# Altium PCB CAN_PCB.PcbDoc
Units mm, origin at the board's own origin, x right, y up, seen from the top; angles counter-clockwise.
Board outline 48.27 x 28.2 mm, 2 copper layers (Top Layer, Bottom Layer); 17 components, 16 nets, 67 pads, 16 vias.
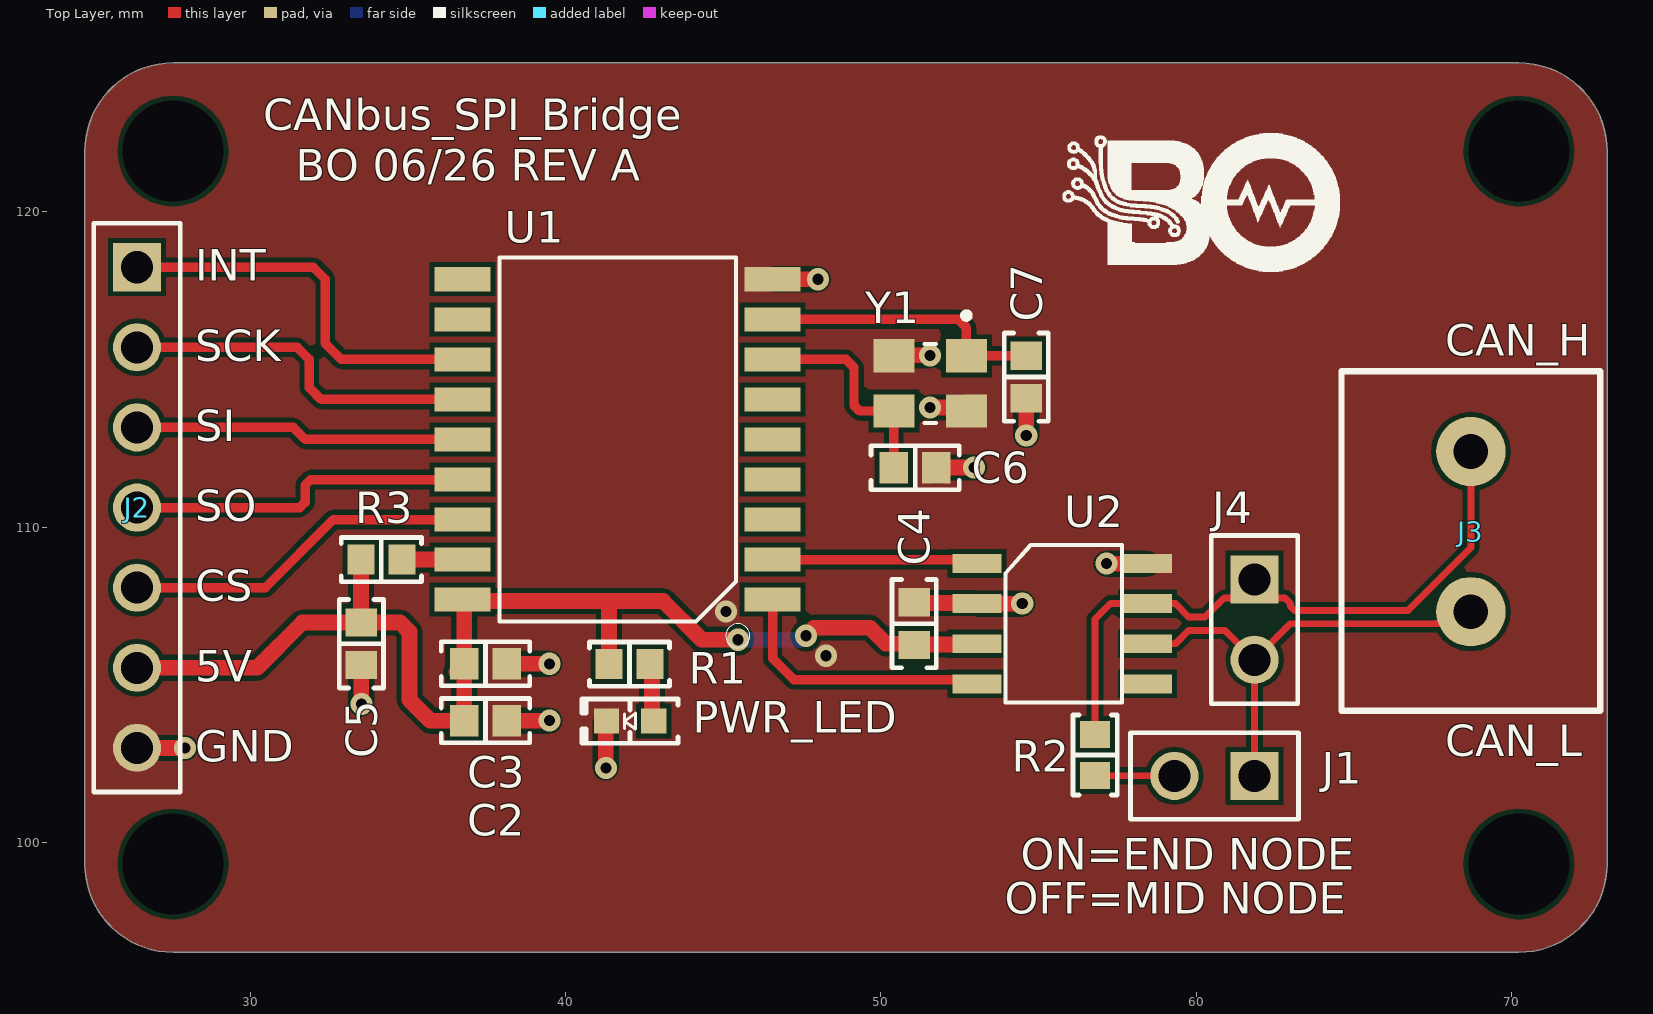
[diagram p0: Top Layer view]
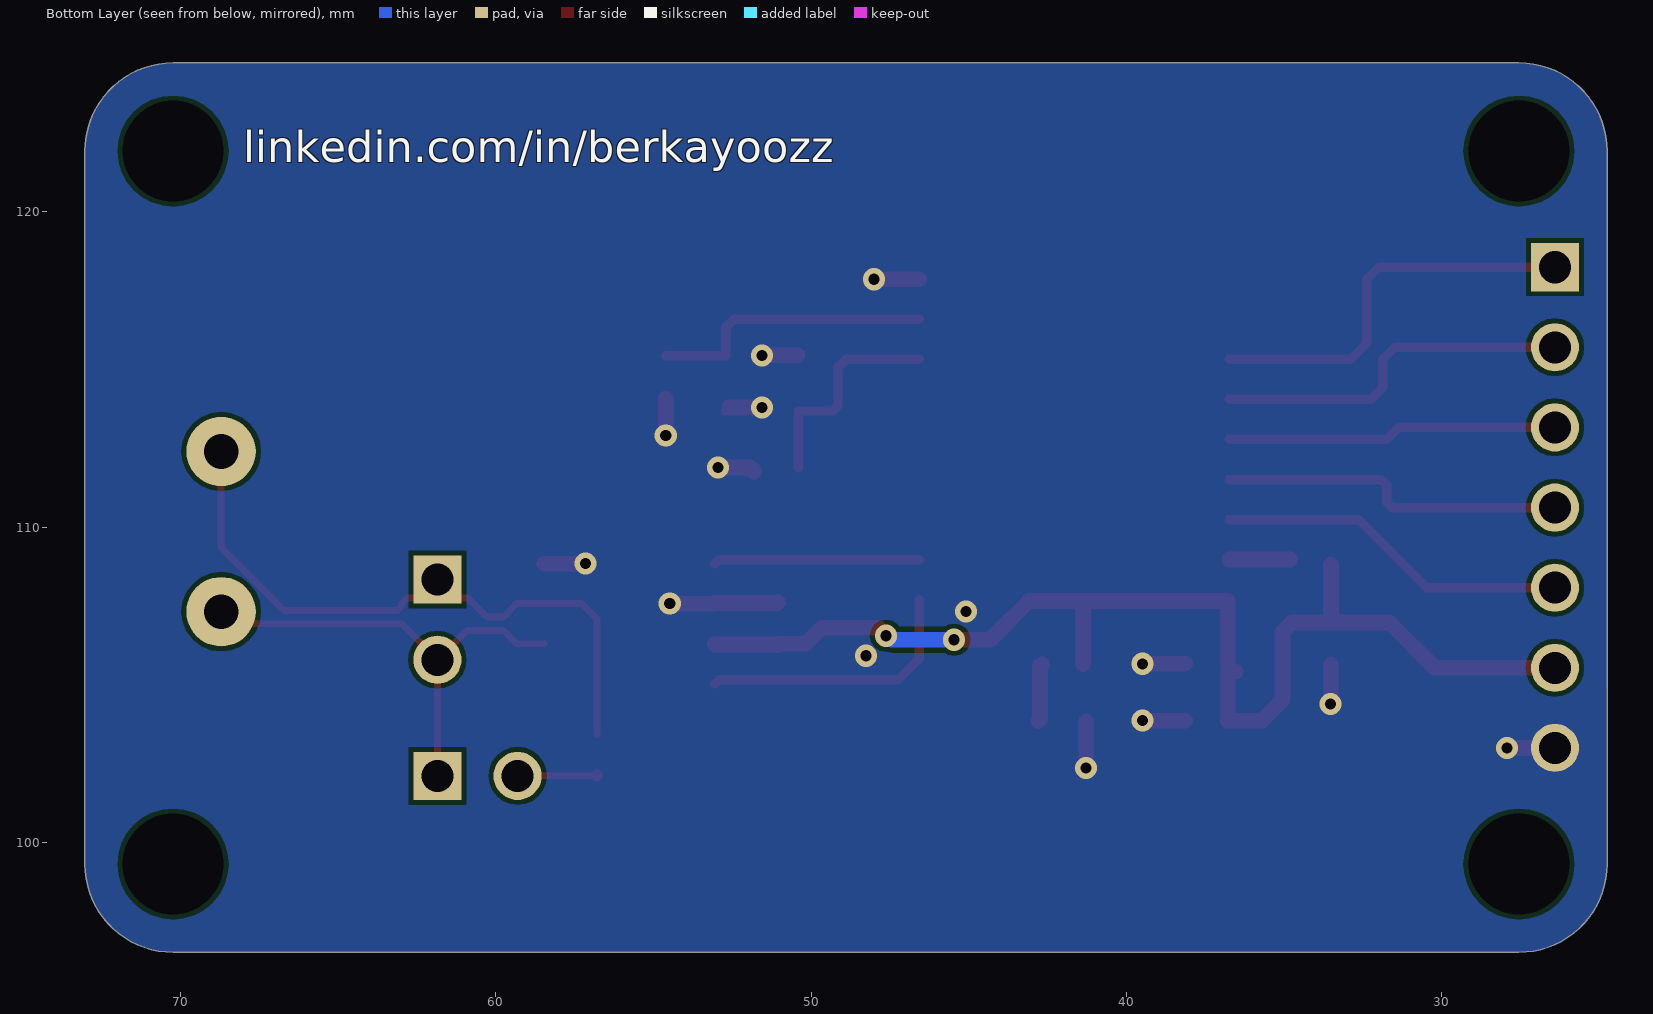
[diagram p1: Bottom Layer view, seen from below]
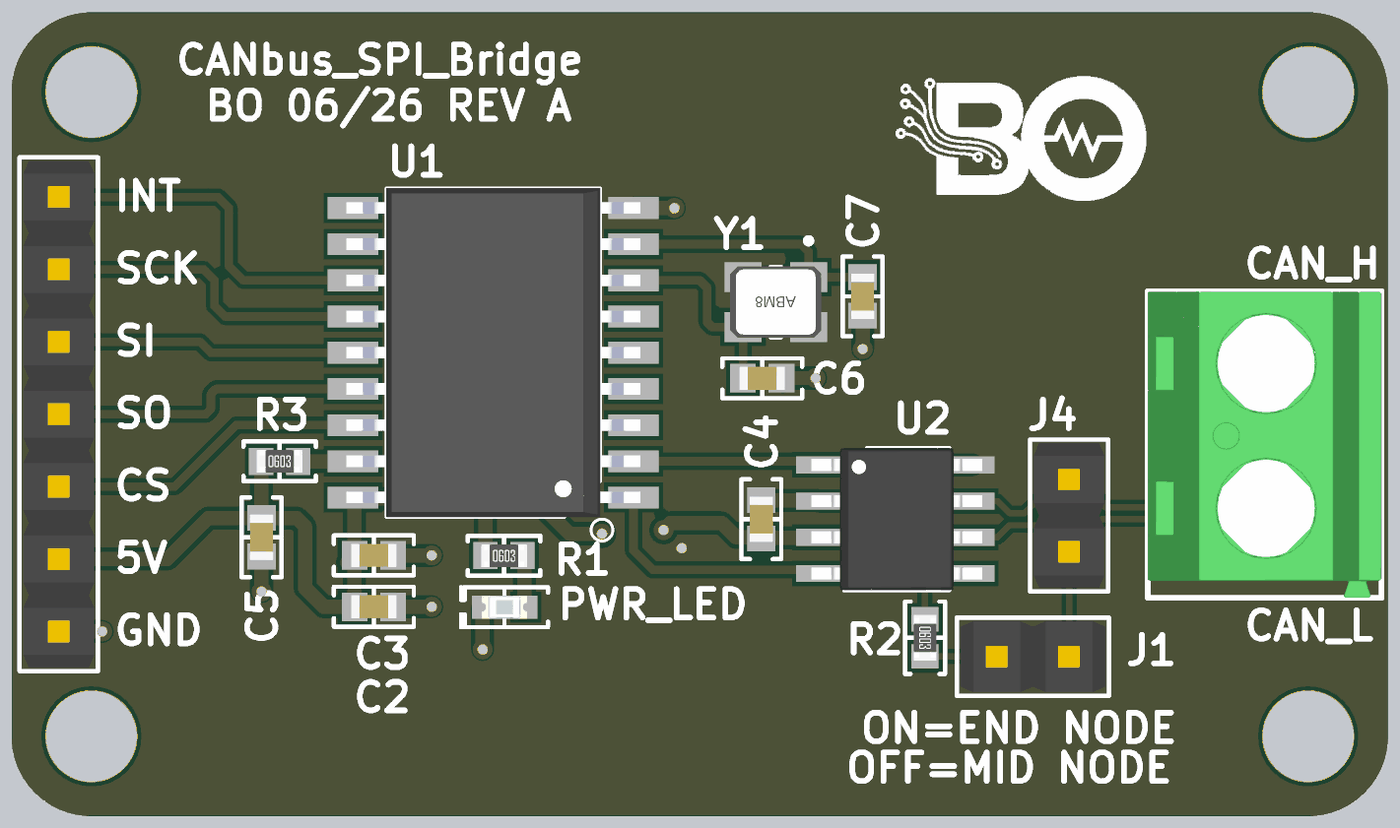
[diagram p2: 3D render of the assembled board from above, using the file's embedded part models]

## Layer stack, top to bottom
Top Solder: solder mask 0.0102, Solder Resist, Dk 3.5
Top Layer: signal copper 0.0356
Dielectric 1: dielectric 0.32, FR-4, Dk 4.8
Bottom Layer: signal copper 0.0356
Bottom Solder: solder mask 0.0102, Solder Resist, Dk 3.5

## Board outline
24.762,99.314 24.762,121.92 cw(c27.559,121.92) 27.559,124.717 70.231,124.717 cw(c70.231,121.92) 73.028,121.92 73.028,99.314 cw(c70.231,99.314) 70.231,96.517 27.559,96.517 cw(c27.559,99.314)

## Design rules (kind name [scope] priority, off if disabled: settings)
Clearance [All] p1: gap=0.15 ignorepadtopadclearanceinfootprint=FALSE
DiffPairsRouting [All] p1: maxlimit=0.254 minlimit=0.2 mostfreqgap=0.203 toplayer_minwidth=0.2 toplayer_maxwidth=0.381 toplayer_prefwidth=0.219 bottomlayer_prefgap=0.203 bottomlayer_minwidth=0.2 bottomlayer_maxwidth=0.381 bottomlayer_prefwidth=0.219 maxuncoupledlength=20
PlaneConnect [All] p1: planeconnectstyle=Direct reliefexpansion=0.508 reliefentries=4 reliefconductorwidth=0.254 reliefairgap=0.254
PolygonConnect [All] p1: connectstyle=Direct reliefconductorwidth=0.254 reliefentries=4 polygonreliefangle="90 Angle" airgapwidth=0.254
RoutingVias [All] p1: holewidth=0.35 width=0.7 viastyle="Through Hole" minholewidth=0.3 minwidth=0.6 maxholewidth=0.7 maxwidth=1.27
SilkToSilkClearance [All] p1: silktosilkclearance=0.1
SilkToSolderMaskClearance [IsPad] p1: minsilkscreentomaskgap=0.1 clearancetoexposedcopper=TRUE
SolderMaskExpansion [All] p1: expansion=0 istentingtop=FALSE
SupplyNets "Schematic Supply Nets_1" [InNet('VCC')] p1: voltage=0.000
SupplyNets "Schematic Supply Nets" [InNet('GND')] p2: voltage=0.000
Width [All] p1: maxlimit=1 minlimit=0.2 preferedwidth=0.25 minimp=50.000000 maximp=50.000000 favimp=50.000000
26 further rules are at their usual default settings.

## Classes and differential pairs
component class CAN_Schematic: C2 C3 C4 C5 C6 C7 J1 J2 J3 PWR_LED R1 R2 R3 U1 U2 Y1
differential pair CAN: +CAN_P -CAN_N

## Components (designator, comment, footprint, x,y, rotation, side; value= is the part's Value field where it differs from the comment)
C2 "4.7 µF" "CAP 0603_1608" 37.465,103.86 r180 top
C3 "0.1 µF" "CAP 0603_1608" 37.465,105.664 r180 top
C4 "0.1 µF" "CAP 0603_1608" 51.054,106.934 r270 top
C5 "0.1 µF" "CAP 0603_1608" 33.528,106.299 r90 top
C6 "12pF" "CAP 0603_1608" 51.087,111.88 r180 top
C7 "12pF" "CAP 0603_1608" 54.61,114.754 r90 top
J1 "PH1-02-UA" CONN_PH1-02-UA_ADM 61.849,102.108 r180 top
J2 "CONN HEADER VERT 7POS 2.54MM" CONN_PH1-07-UA_ADM 26.416,118.237 r270 top
J3 "282837-2" "TE 282837-2" 68.707,109.855 r270 top
J4 "PH1-02-UA" CONN_PH1-02-UA_ADM 61.849,108.331 r270 top
PWR_LED "Green" "LED 0603_1608 GREEN" 42.048,103.847 r180 top (schematic designator D1)
R1 "1 kOhms" "RES 0603_1608" 42.032,105.651 r0 top
R2 "120 Ohms" "RES 0603_1608" 56.794,102.772 r270 top
R3 "10k" "RES 0603_1608" 34.163,108.966 r0 top
U1 "CANbus Controller CAN 2.0 SPI Interface 18-SOIC" SOIC18-1.27-11.5X7.5MM 41.656,112.776 r90 top
U2 "1/1 Transceiver Half CANbus 8-SO" SOIC8 55.753,106.934 r270 top
Y1 "ABM8-16.000MHZ-10-1-U-T" XTAL_ABM8-16.000MHZ-10-1-U-T 51.562,114.554 r270 top

## Footprints (in the part's own frame and the unit in brackets; to place one, negate y for a bottom-side part, rotate by r counter-clockwise, add the part's x,y. Pads: shape width x height; smd on the part's side, far side on the other; paste and mask are expansions set on the pad)
"CAP 0603_1608" [mm] "Chip Capacitor, 2-Leads, Body 1.60x0.80mm, IPC Medium Density"
  rect 0.9x1 smd: 1(-0.675,0) 2(0.675,0)
  silkscreen extent -1.4,-0.7 1.4,0.7, body extent -0.8,-0.41 0.8,0.41, height 0.82
CONN_PH1-02-UA_ADM [mil]
  rect 60x60 hole 40 paste-99999 mask+0: 1(0,0)
  round 60 hole 40 paste-99999 mask+0: 2(100,0)
  silkscreen extent -55,-54 155,54, body extent -50,-49 150,49, height 335
CONN_PH1-07-UA_ADM [mil]
  rect 60x60 hole 40 paste-99999 mask+0: 1(0,0)
  round 60 hole 40 paste-99999 mask+0: 2(100,0) 3(200,0) 4(300,0) 5(400,0) 6(500,0) 7(600,0)
  silkscreen extent -55,-54 655,54, body extent -50,-49 650,49, height 335
"LED 0603_1608 GREEN" [mm] "Chip Diode, 2-Leads, Body 1.60x0.80mm, IPC Medium Density"
  rect 0.8x0.8 smd: 1(-0.75,0) 2(0.75,0)
  silkscreen extent -1.52,-0.7 1.52,0.7, body extent -0.8,-0.4 0.8,0.4, height 0.53
"RES 0603_1608" [mm] "Chip Resistor, 2-Leads, Body 1.60x0.80mm, IPC Medium Density"
  rect 0.85x0.95 smd: 1(-0.65,0) 2(0.65,0)
  silkscreen extent -1.27,-0.7 1.27,0.7, body extent -0.8,-0.4 0.8,0.4, height 0.45
SOIC8 [mm]
  rect 0.6x1.55 smd: 1(-1.905,-2.7) 2(-0.635,-2.7) 3(0.635,-2.7) 4(1.905,-2.7) 5(1.905,2.7) 6(0.635,2.7) 7(-0.635,2.7) 8(-1.905,2.7)
  silkscreen extent -2.5,-1.8 2.5,1.9, body extent -2.5,-2.94 2.5,3.06, height 1.75
SOIC18-1.27-11.5X7.5MM [mil]
  rect 30x70 smd: 1(-200,-193.5) 2(-150,-193.5) 3(-100,-193.5) 4(-50,-193.5) 5(0,-193.5) 6(50,-193.5) 7(100,-193.5) 8(150,-193.5) 9(200,-193.5) 10(200,193.5) 11(150,193.5) 12(100,193.5) 13(50,193.5) 14(0,193.5) 15(-50,193.5) 16(-100,193.5) 17(-150,193.5) 18(-200,193.5)
  silkscreen extent -260,-165 227,148, body extent -227,-203 227,203, height 104
"TE 282837-2" [mm] "Wire to Board Terminal Block Horizontal with Board, 2 Postions, Body 10.76x8.2 mm, Pitch 5.08mm"
  round 2.2 hole 1.1: 1(-2.54,0) 2(2.54,0)
  silkscreen extent -5.08,-4.1 5.68,4.1, body extent -5.08,-4.1 5.68,4.1, height 10.3
XTAL_ABM8-16.000MHZ-10-1-U-T [mm]
  rect 1.05x1.3 smd: 1(-0.875,1.15) 2(-0.875,-1.15) 3(0.875,-1.15) 4(0.875,1.15)
  silkscreen extent -2.25,-0.18 1.25,1.25, body extent -1.25,-1.6 1.25,1.6, height 0.8

## Part data
C2: library part 0603YW475KAT2A, "CAP CER 4.7UF 16V X6S 0603"
C3 C4 C5: library part CL10E104KC8VPNC, "CAP CER 100NF 100V X8L 0603"
C6 C7: library part 0603YA120KAT2A, "CAP CER 12PF 16V C0G/NP0 0603"
J1 J4: "No Description Available"
J2: library part PH1-07-UA
J3: "TERM BLK 2P SIDE ENT 5.08MM PCB"
PWR_LED: library part 5973316507F, "LED GREEN 0603 SMD"
R1: library part TNPU06031K00AYEA00, "RES 1 KOHM 0.05% 1/10W 0603"
R2: library part TNPU0603120RAYEN00, "RES 120 OHM 0.05% 1/10W 0603"
R3: library part TNPW060310K0FHTA, "RES 10K OHM 1% 1/10W 0603"
U1: library part MCP2515T-I/SO, "CAN controller w/ SPI interface18 SOIC .300in T/R"
U2: library part TJA1050T/CM,118, "TJA1050T Series 5.25 V 1 MBd Surface Mount High Speed CAN Transceiver - SOIC-8"
Y1: "16 MHz Â±10ppm Crystal 10pF 70 Ohms 4-SMD, No Lead"

## Free pads (board coordinates)
  round 1.524 hole 3.2: ""(27.559,99.314) ""(27.559,121.92) ""(70.231,99.314) ""(70.231,121.92)

## Via types
v1: diameter 0.7, hole 0.35, Top Layer to Bottom Layer, tented both sides, 16 vias

## Nets (pads, with @x,y where several pads share a name; then routed paths per layer and width w, separated by ;. In a path a pad name is that pad's centre, name@x,y a point inside that pad or via, vN(x,y) a via of type N, cw(c..) or ccw(c..) an arc to the next point about the centre after c; other vN are vias at no path point)
CAN_N: J1.1 J3.2 J4.2 U2.6 | length 14.7
  Top Layer w0.219: U2.6 59.337,106.299 59.761,106.723 60.917,106.723 J4.2 ; J1.1 J4.2 ; J3.2@68.326,107.315 67.947,106.936 67.59,106.936 67.588,106.934 62.992,106.934 J4.2
CAN_P: J3.1 J4.1 R2.1 U2.7 | length 20.8
  Top Layer w0.219: R2.1 56.794,107.086 57.277,107.569 U2.7 59.337,107.569 59.761,107.145 60.282,107.145 60.887,107.75 61.268,107.75 J4.1 62.43,107.75 62.811,107.75 62.992,107.569 62.992,107.481 63.12,107.353 66.713,107.353 68.707,109.347 J3.1
GND: C2.1 C3.1 C4.1 C5.1 C6.1 C7.1 J2.7 PWR_LED.2 U1.9 U2.2 U2.8 Y1.2 Y1.4 | length 18
  Top Layer w0.3: Y1.2 Y1.2@50.426,115.443 ; C6.1 51.762,111.814 C6.1@51.816,111.76 ; Y1.4@52.599,113.792 Y1.4
  Top Layer w0.5: J2.7 v1(27.94,102.997) ; v1(33.528,104.394) C5.1 ; C2.1 v1(39.497,103.86) ; C3.1 v1(39.497,105.664) ; v1(41.281,102.362) PWR_LED.2@41.281,103.83 ; U1.9 v1(48.006,117.856) ; Y1.2@50.426,115.443 v1(51.562,115.443) ; C4.1 51.074,107.589 53.033,107.589 U2.2 v1(54.483,107.569) ; v1(51.562,113.792) Y1.4@52.599,113.792 ; C6.1@51.816,111.76 51.943,111.887 v1(52.959,111.887) ; v1(54.61,112.903) C7.1 ; v1(57.15,108.839) U2.8
  other v1: 48.26,105.918 45.085,107.315
NetC6_2: C6.2 U1.7 Y1.3 | length 7
  Top Layer w0.3: U1.7 48.895,115.316 49.149,115.062 49.149,113.855 49.325,113.679 Y1.3 C6.2
NetC7_2: C7.2 U1.8 Y1.1 | length 9
  Top Layer w0.3: U1.8 52.451,116.586 52.712,116.325 Y1.1 C7.2
NetD1_1: PWR_LED.1 R1.2 | length 1.9
  Top Layer w0.5: R1.2 42.74,105.593 42.74,103.905 PWR_LED.1
NetJ1_2: J1.2 R2.2 | length 2.5
  Top Layer w0.219: R2.2@56.801,102.115 J1.2@59.302,102.115
  Top Layer w0.381: R2.2 R2.2@56.801,102.115 ; J1.2@59.302,102.115 J1.2
NetJ2_1: J2.1 U1.12 | length 12.7
  Top Layer w0.3: J2.1 32.004,118.237 32.385,117.856 32.385,115.824 32.893,115.316 U1.12
NetJ2_2: J2.2 U1.13 | length 11.5
  Top Layer w0.3: J2.2 31.496,115.697 31.877,115.316 31.877,114.421 32.252,114.046 U1.13
NetJ2_3: J2.3 U1.14 | length 10.5
  Top Layer w0.3: J2.3 31.369,113.157 31.75,112.776 U1.14
NetJ2_4: J2.4 U1.15 | length 11
  Top Layer w0.3: J2.4 31.574,110.617 31.75,110.793 31.75,111.33 31.926,111.506 U1.15
NetJ2_5: J2.5 U1.16 | length 11.2
  Top Layer w0.3: J2.5 30.48,108.077 32.639,110.236 U1.16
NetR3_2: R3.2 U1.17 | length 1.9
  Top Layer w0.5: R3.2 U1.17
NetU1_1: U1.1 U2.4 | length 8.7
  Top Layer w0.3: U1.1 46.571,105.829 47.244,105.156 52.926,105.156 U2.4
NetU1_2: U1.2 U2.1 | length 6.5
  Top Layer w0.3: U1.2 52.926,108.966 U2.1
VCC: C2.2 C3.2 C4.2 C5.2 J2.6 R1.1 R3.1 U1.18 U2.3 | length 38.5
  Top Layer w0.5: J2.6 30.226,105.537 31.663,106.974 C5.2 ; R3.1@33.513,108.803 33.52,108.796 33.52,106.982 C5.2 ; C3.2@36.54,105.414 36.59,105.414 36.79,105.614 C3.2 36.79,107.656 41.383,107.656 ; C3.2@36.79,105.414 C2.2 35.713,103.86 35.052,104.521 35.052,106.68 34.758,106.974 C5.2 ; R1.1 41.383,107.656 ; v1(45.466,106.426) 44.323,106.426 43.093,107.656 41.383,107.656 ; v1(47.625,106.553) 47.879,106.807 49.657,106.807 50.165,106.299 51.014,106.299 C4.2 51.074,106.279 53.033,106.279 U2.3
  Bottom Layer w0.5: v1(45.466,106.426) 47.444,106.426 47.571,106.553 v1(47.625,106.553)
pads on no net: U1.3 U1.4 U1.5 U1.6 U1.10 U1.11 U2.5

## Polygon pours and split planes (outlines as drawn)
GND on Top Layer "Top Layer-GND" (solid, remove dead copper, pour order 6): 24.765,99.314 ccw(c27.559,99.314) 27.559,96.52 27.559,96.55 70.231,96.55 70.231,96.52 ccw(c70.231,99.314) 73.025,99.314 72.995,99.314 72.995,121.92 73.025,121.92 ccw(c70.231,121.92) 70.231,124.714 70.231,124.684 27.559,124.684 27.559,124.714 ccw(c27.559,121.92) 24.765,121.923 24.762,121.92 24.795,99.314
GND on Bottom Layer "Bottom Layer-GND" (solid, remove dead copper, pour order 5): 24.765,99.314 ccw(c27.559,99.314) 27.559,96.52 27.559,96.55 70.231,96.55 70.231,96.52 ccw(c70.231,99.314) 73.025,99.314 72.995,99.314 72.995,121.92 73.025,121.92 ccw(c70.231,121.92) 70.231,124.714 70.231,124.684 27.559,124.684 27.559,124.714 ccw(c27.559,121.92) 24.765,121.923 24.762,121.92 24.795,99.314

## Silkscreen, mask and mechanical layers (free items; w line width, h text height)
Top Overlay:
  drawing of 4 lines, arcs and shapes, not listed
  text "CANbus_SPI_Bridge" at 30.426,122.58 h1
  text "BO 06/26 REV A" at 31.442,120.977 h1
  text "INT" at 28.267,117.802 h1
  text "CAN_H" at 67.891,115.429 h1
  text "SCK" at 28.267,115.262 h1
  text "SI" at 28.267,112.722 h1
  text "SO" at 28.267,110.182 h1
  text "CS" at 28.267,107.642 h1
  text "5V" at 28.267,105.102 h1
  text "CAN_L" at 67.891,102.729 h1
  text "GND" at 28.267,102.562 h1
  text "ON=END NODE" at 54.429,99.133 h1
  text "OFF=MID NODE" at 53.921,97.736 h1
Bottom Overlay:
  text "linkedin.com/in/berkayoozz" at 67.999,121.564 h1